# Altium PCB Wings_pwm.PcbDoc
Units mm, origin at the board's own origin, x right, y up, seen from the top; angles counter-clockwise.
Board outline 20 x 14 mm, 2 copper layers (Top Layer, Bottom Layer), stack 2.071 mm thick; 17 components, 13 nets, 55 pads, 7 vias.
Unrouted connection lines stored in the file: 1.
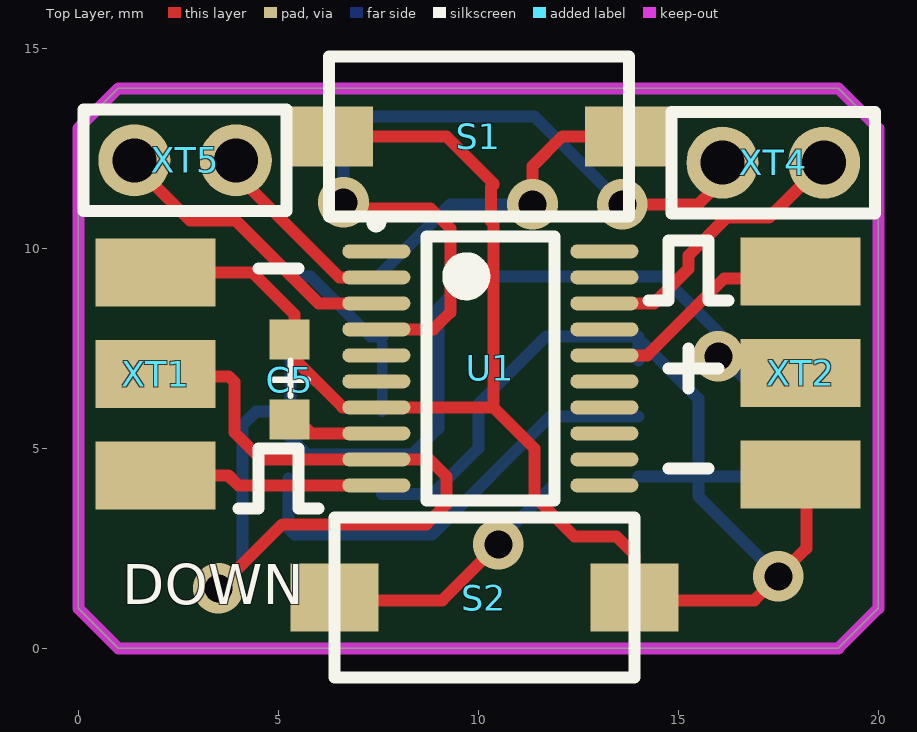
[diagram p0: Top Layer view]
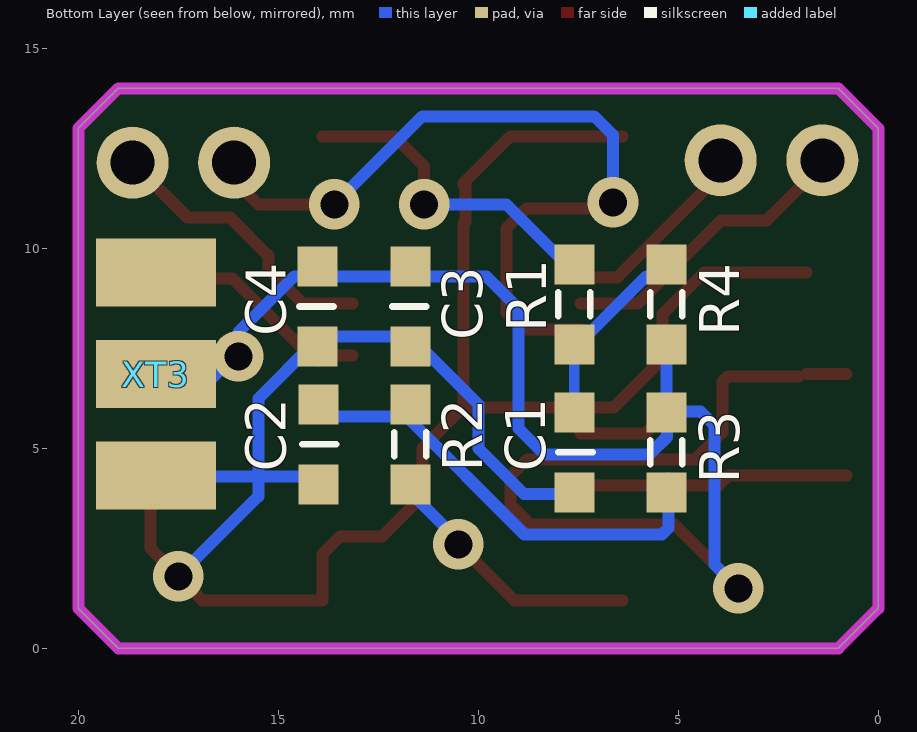
[diagram p1: Bottom Layer view, seen from below]
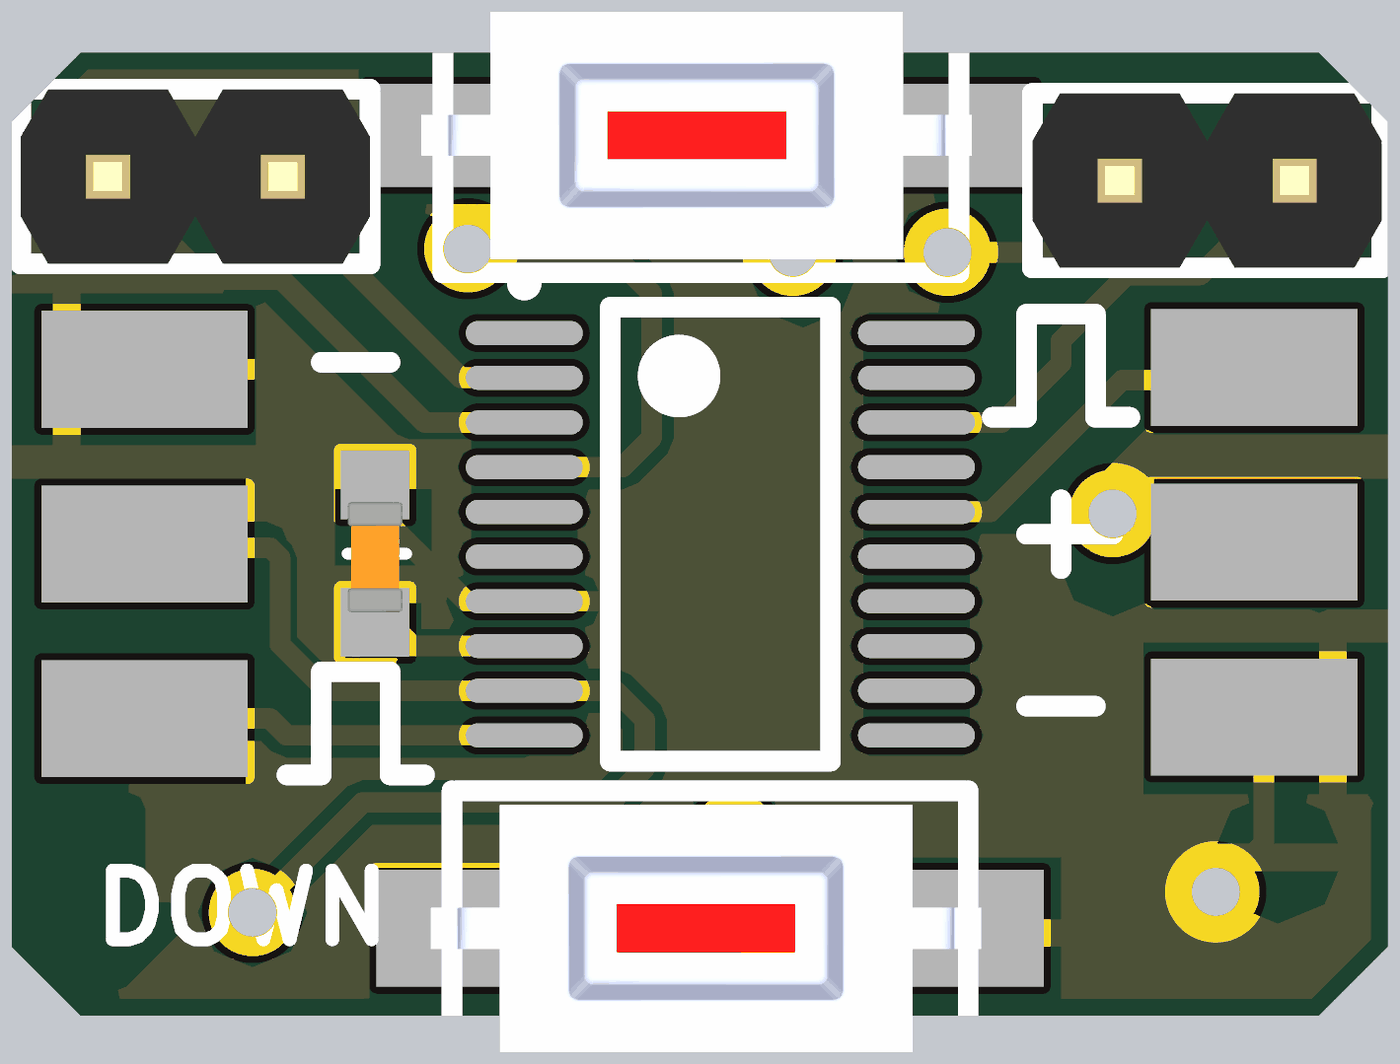
[diagram p2: 3D render of the assembled board from above, using the file's embedded part models]
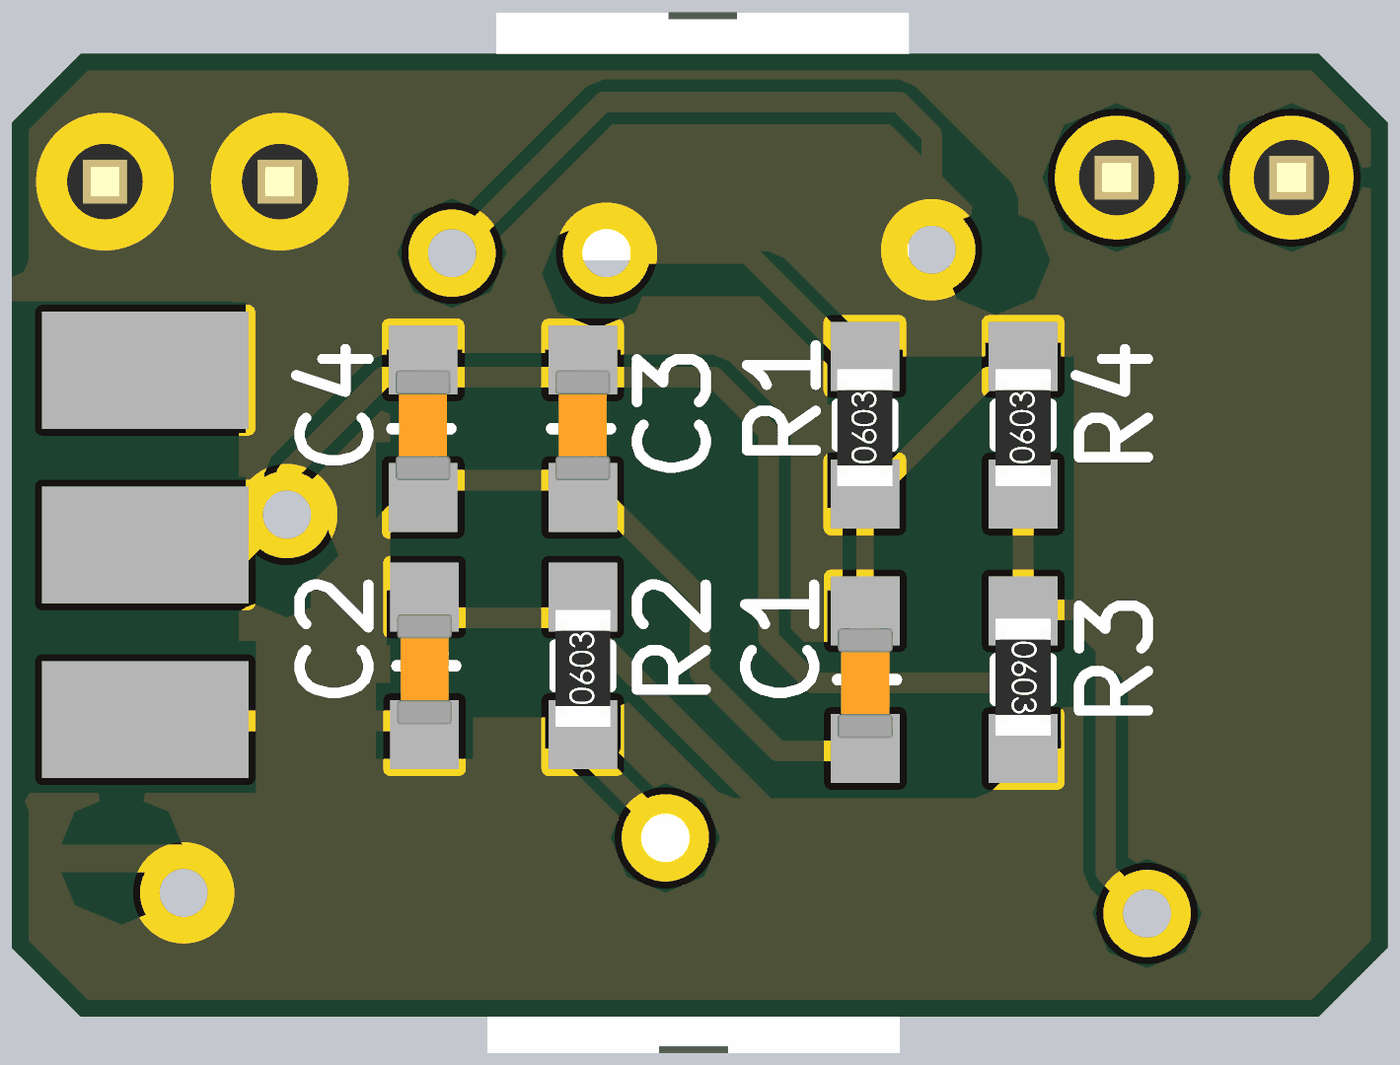
[diagram p3: 3D render of the assembled board from below, using the file's embedded part models]

## Layer stack, top to bottom
Top Solder: solder mask 0.0102, Solder Resist, Dk 3.5
Top Layer: signal copper 0.0356
Dielectric 1: dielectric 2, FR-4, Dk 4.8
Bottom Layer: signal copper 0.0356
Bottom Solder: solder mask 0.0102, Solder Resist, Dk 3.5

## Board outline
0,1.1 0,12.9 0,13 1,14 19,14 20,13 20,1.1 20,1 19,0 1,0 0,1

## Design rules (kind name [scope] priority, off if disabled: settings)
Clearance Poly_Clearance [All vs InPoly] p1: gap=0.1
Clearance Clearance_1 [All] p2: gap=0.25
PolygonConnect [All] p1: connectstyle=Relief reliefconductorwidth=0.4 reliefentries=2 polygonreliefangle="90 Angle" airgapwidth=0.254
RoutingVias [All] p1: holewidth=0.711 width=1.27 viastyle="Through Hole" minholewidth=0.711 minwidth=1.27 maxholewidth=0.711 maxwidth=1.27
SolderMaskExpansion SolderMaskExpansion_via [IsVia] p1: expansion=-1
SolderMaskExpansion SolderMaskExpansion_1 [All] p2: expansion=0.102
Width [All] p1: maxlimit=1 minlimit=0.254 preferedwidth=0.254
30 further rules are at their usual default settings.

## Components (designator, comment, footprint, x,y, rotation, side; value= is the part's Value field where it differs from the comment)
C1 "Condensator" C0603 7.595,4 r90 bottom
C2 "Condensator" C0603 14,4.2 r90 bottom
C3 "1uF" C0603 11.7,9.449 r270 bottom
C4 "100nF" C0603 14.021,9.449 r270 bottom
C5 "1uF" C0603 5.283,5.817 r90 top
R1 "Resistor" R0603 7.6,7.7 r90 bottom
R2 "Resistor" R0603 11.7,4.2 r90 bottom
R3 "10K" R0603 5.3,5.8 r270 bottom
R4 "10K" R0603 5.3,7.7 r90 bottom
S1 "*" Tact_switch_smd#1 13.767,12.8 r180 top
S2 "*" Tact_switch_smd#2 13.9,1.27 r180 top
U1 "STM8S003" STM8S003_TSOP20 10.3,7 r0 top
XT1 "*" flat_3pad 1.93,4.318 r90 top
XT2 "*" flat_3pad 18.059,9.423 r270 top
XT3 "*" flat_3pad 18.059,9.398 r270 bottom
XT4 "*" "Pins 2x2.54" 16.104,12.141 r0 top
XT5 "*" "Pins 2x2.54" 3.94,12.2 r180 top

## Footprints (in the part's own frame and the unit in brackets; to place one, negate y for a bottom-side part, rotate by r counter-clockwise, add the part's x,y. Pads: shape width x height; smd on the part's side, far side on the other; paste and mask are expansions set on the pad)
C0603 [mm]
  rect 1x1 smd: 1(-0.1,0) 2(1.9,0)
  silkscreen extent 0.9,-0.45 0.9,0.4, body extent 0.05,-0.4 1.65,0.4, height 0.81
flat_3pad [mm]
  rect 1.7x3 smd: 1(0,0) 2(2.54,0) 3(5.08,0)
"Pins 2x2.54" [mm]
  round 1.8 hole 1.1: 1(0,0) 2(2.54,0)
  silkscreen extent -1.27,-1.27 3.81,1.27, body extent -1.27,-1.27 3.81,1.27, height 8.81
R0603 [mm]
  rect 1x1 smd: 1(-0.1,0) 2(1.9,0)
  silkscreen extent 0.6,-0.4 1.2,0.4, body extent 0.01,-0.4 1.71,0.4, height 0.56
STM8S003_TSOP20 [mm]
  oval 1.7x0.35 smd: 1(-2.85,2.925) 2(-2.85,2.275) 3(-2.85,1.625) 4(-2.85,0.975) 5(-2.85,0.325) 6(-2.85,-0.325) 7(-2.85,-0.975) 8(-2.85,-1.625) 9(-2.85,-2.275) 10(-2.85,-2.925) 11(2.85,-2.925) 12(2.85,-2.275) 13(2.85,-1.625) 14(2.85,-0.975) 15(2.85,-0.325) 16(2.85,0.325) 17(2.85,0.975) 18(2.85,1.625) 19(2.85,2.275) 20(2.85,2.925)
  silkscreen extent -2.97,-3.3 1.6,3.77, body extent -2.25,-3.3 2.25,3.3, height 1.2
Tact_switch_smd#1 [mm]
  rect 2.2x1.5 smd: 1(0,0) 2(7.5,0)
  silkscreen extent 0,-2 7.5,2, body extent -0.19,-1.8 7.81,1.8, height 2.51
Tact_switch_smd#2 [mm]
  rect 2.2x1.7 smd: 1(0,0) 2(7.5,0)
  silkscreen extent 0,-2 7.5,2, body extent -0.19,-1.8 7.81,1.8, height 2.51

## Part data
C3 C4 C5: library part Condensator
R3 R4: library part Resistor
S1 S2: library part Tact_switch
XT1 XT2 XT3: library part "Pins 3x2.54"
XT4 XT5: library part "Pins 2x2.54"

## Via types
v1: diameter 1.27, hole 0.7, Top Layer to Bottom Layer, 7 vias

## Nets (pads, with @x,y where several pads share a name; then routed paths per layer and width w, separated by ;. In a path a pad name is that pad's centre, name@x,y a point inside that pad or via, vN(x,y) a via of type N, cw(c..) or ccw(c..) an arc to the next point about the centre after c; other vN are vias at no path point)
GND: C1.1 C2.1 C3.2 C4.2 C5.2 S1.2 S2.1 U1.7 XT1.3 XT2.3 XT3.3 | length 55
  Top Layer w0.3: XT1.3@1.8,9.4 4.35,9.4 5.4,8.35 5.4,7.234 6.609,6.025 U1.7 10.375,6.025 ; S1.2@6.4,12.8 9.2,12.8 10.375,11.625 10.375,11.585 10.319,11.529 10.319,10.671 10.375,10.615 10.375,6.025 ; XT2.3@18.2,4.32 18.2,2.5 v1(17.5,1.8) 16.9,1.2 13.9,1.2 S2.1 13.9,2.35 13.45,2.8 12.4,2.8 11.4,3.8 11.4,5 10.375,6.025
  Bottom Layer w0.3: C1.1@7.595,3.861 8.861,3.861 10,5 10,6.1 11.7,7.8 14,7.8 C4.2@14,7.2 ; C2.1@14,4.3 15.5,4.3 ; C4.2@14.107,7.635 15.5,6.242 15.5,4.3 ; v1(17.5,1.8) 15.5,3.8 15.5,4.3 ; XT3.3@18.2,4.32 18.18,4.3 15.5,4.3
NetC1_2: C1.2 R1.1 R4.2 | length 4.6
  Bottom Layer w0.254: C1.2@7.6,5.905 R1.1
  Bottom Layer w0.3: R4.2@5.3,9.3 5.8,9.3 7.3,7.8 R1.1@7.6,7.8
NetC2_2: C2.2 R2.2 R3.2 | length 11.3
  Bottom Layer w0.3: R3.2@5.25,4.25 5.25,3.005 5.41,2.845 8.845,2.845 11.8,5.8 C2.2@14,5.8
NetC5_1: C5.1 U1.8 | length 2.1
  Top Layer w0.3: C5.1@5.4,5.6 5.6,5.6 5.825,5.375 U1.8
NetR1_2: R1.2 S1.1 | length 8.4
  Top Layer w0.3: v1(11.354,11.1) 11.354,12.054 12.1,12.8 S1.1 S1.1@13.9,12.8
  Bottom Layer w0.3: R1.2@7.5,9.3 9.3,11.1 v1(11.354,11.1)
NetR2_1: R2.1 S2.2 | length 6.8
  Top Layer w0.3: S2.2@6.4,1.2 9.1,1.2 v1(10.5,2.6)
  Bottom Layer w0.3: v1(10.5,2.6) 10.5,2.7 R2.1@11.9,4.1
NetU1_2: U1.2 XT5.1 | length 5
  Top Layer w0.3: XT5.1@3.44,11.76 4.039,11.76 6.524,9.275 U1.2
NetU1_3: U1.3 XT5.2 | length 7.8
  Top Layer w0.3: XT5.2@1.5,12.4 1.5,11.987 2.787,10.7 3.93,10.7 6.005,8.625 U1.3
NetU1_10: U1.10 XT1.1 | length 6.8
  Top Layer w0.3: XT1.1@0.8,4.32 3.755,4.32 4,4.075 U1.10
PWM_IN: U1.16 XT2.1 XT3.1 | length 5.8
  Top Layer w0.3: U1.16 14.225,7.325 16.14,9.24 XT2.1@18.2,9.24
RST: U1.4 XT4.1 | length 20.7
  Top Layer w0.3: v1@6.629,11 8.8,11 9.3,10.5 9.3,8.4 8.875,7.975 U1.4 ; v1(13.6,11.1) 15.5,11.1 16.4,12 XT4.1@16.4,12.8
  Bottom Layer w0.3: v1(6.629,11.151) 6.629,12.827 7.102,13.3 11.4,13.3 v1(13.6,11.1)
SWIM: U1.18 XT4.2 | length 7.4
  Top Layer w0.3: U1.18 14.391,8.625 15.25,9.484 15.25,9.814 16.205,10.77 17.272,10.77 XT4.2 ; XT4.2@18.94,12.54 XT4.2@18.94,12.8
VCC: C3.1 C4.1 R3.1 R4.1 U1.9 XT1.2 XT2.2 XT3.2 | length 43.8
  Top Layer w0.3: XT1.2@0.8,6.86 XT1.2@1.8,6.86 ; XT1.2@2,6.8 3.76,6.8 3.9,6.66 3.9,5.4 4.575,4.725 U1.9 8.775,4.725 9.2,4.3 9.2,3.6 8.7,3.1 5.1,3.1 v1(3.5,1.5) ; v1(16,7.3) XT2.2@17.8,7.3
  Bottom Layer w0.3: v1(3.5,1.5) 4.1,2.1 4.1,5.573 4.444,5.917 5.283,5.917 5.283,5.283 5.715,4.851 8.351,4.851 9,5.5 9,8.5 9.8,9.3 14.6,9.3 16,7.9 v1(16,7.3) 16.1,7.3 XT3.2@16.7,6.7 ; R3.1 R4.1 R4.1@5.3,7.8
pads on no net: U1.1 U1.5 U1.6 U1.11 U1.12 U1.13 U1.14 U1.15 U1.17 U1.19 U1.20

## Polygon pours and split planes (outlines as drawn)
GND on Bottom Layer "NONET_L02_P008" (solid, remove dead copper, shelved, pour order 8): 19,0 1,0 0,1 0,13 1,14 19,14 20,13 20,1
GND on Top Layer "Top Layer-No Net" (solid, remove dead copper, shelved, pour order 12): 19,0 1,0 0,1 0,13 1,14 19,14 20,13 20,1

## Keep-outs
Keep-Out Layer:
  lines w0.3: 0,1 1,0 19,0 20,1 20,3 20,13 19,14 1,14 0,13 0,11 0,1

## Silkscreen, mask and mechanical layers (free items; w line width, h text height)
Top Overlay:
  lines w0.15: 5.308,6.308 5.308,6.717 5.308,7.192
  lines w0.3: 4,3.5 4.5,3.5 4.5,5 5.5,5 5.5,3.5 6,3.5 ; 4.5,9.5 5.5,9.5 ; 14.25,8.7 14.75,8.7 14.75,10.2 15.75,10.2 15.75,8.7 16.25,8.7 ; 14.75,4.5 15.75,4.5 ; 14.75,7 16,7 ; 15.25,6.5 15.25,7.5
  text "DOWN" at 1.1,1.1 h1

## Dimensions
0,13 to 20,13 on Mechanical 1
1,14 to 1,0 on Mechanical 1